# Altium PCB Main.PcbDoc
Units mil, origin at the board's own origin, x right, y up, seen from the top; angles counter-clockwise.
Board outline 670 x 1325 mil, 2 copper layers (Top Layer, Bottom Layer); 20 components, 20 nets, 83 pads, 10 vias.
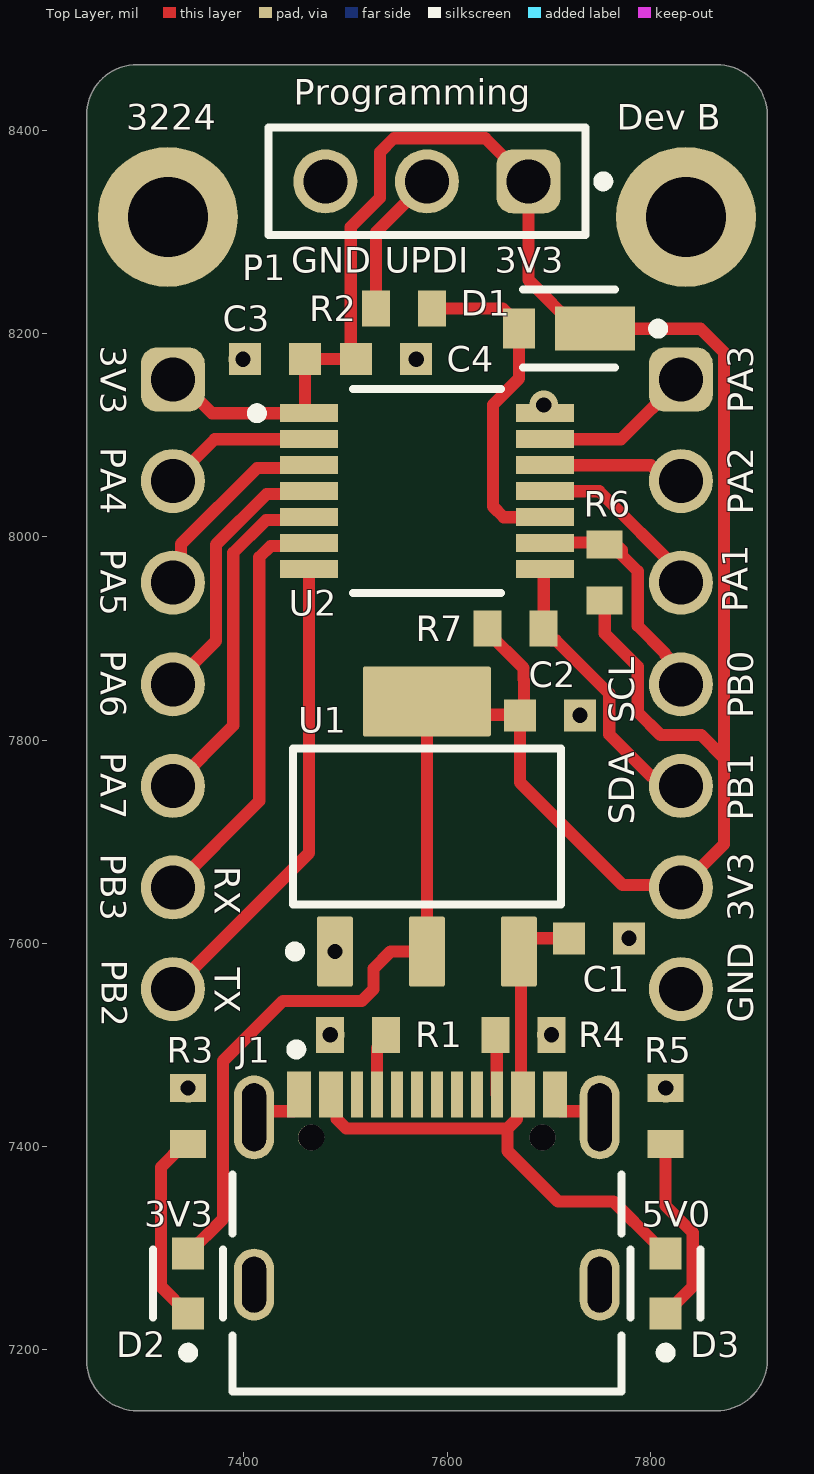
[diagram p0: Top Layer view]
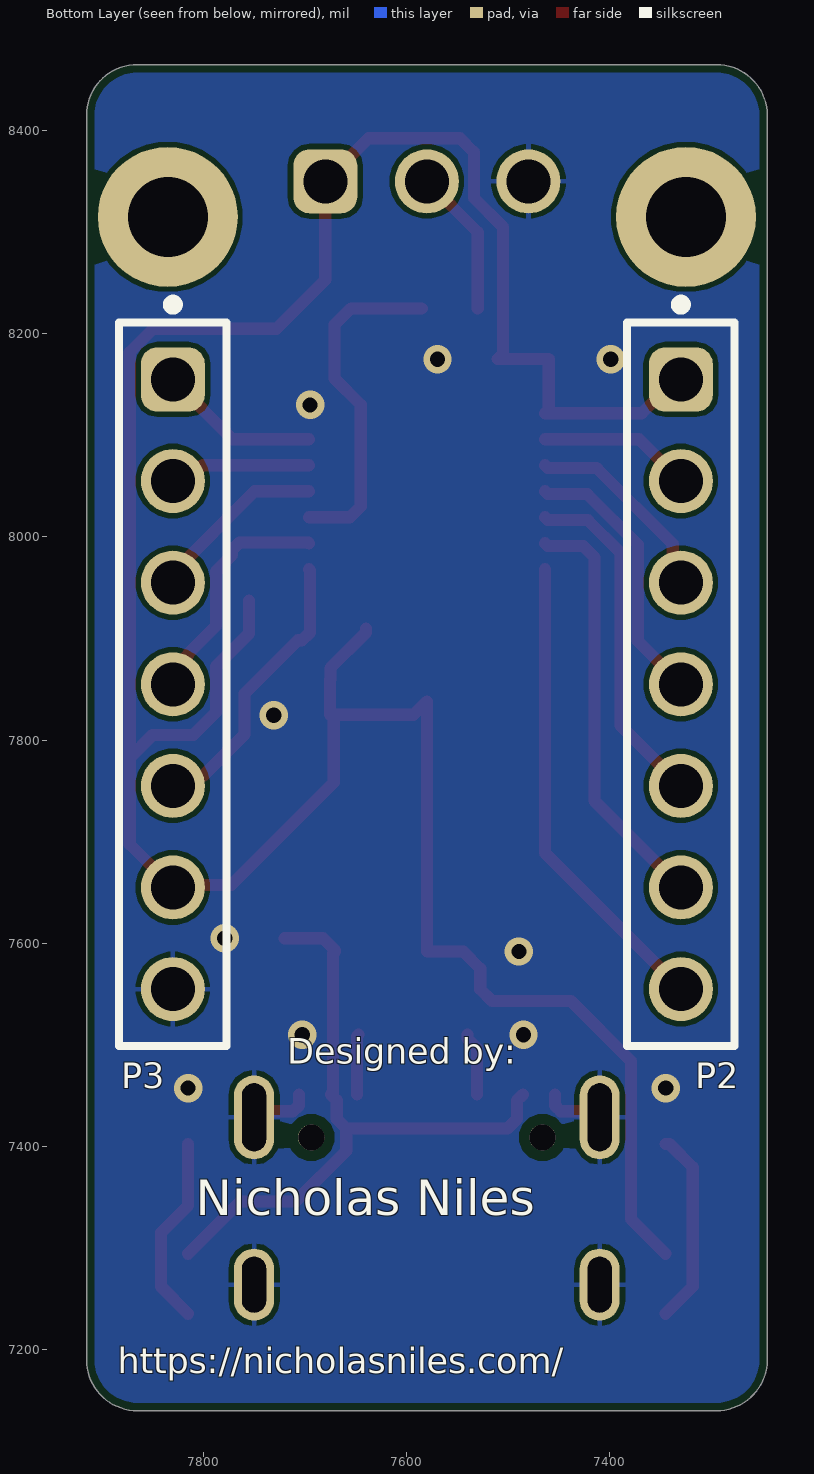
[diagram p1: Bottom Layer view, seen from below]
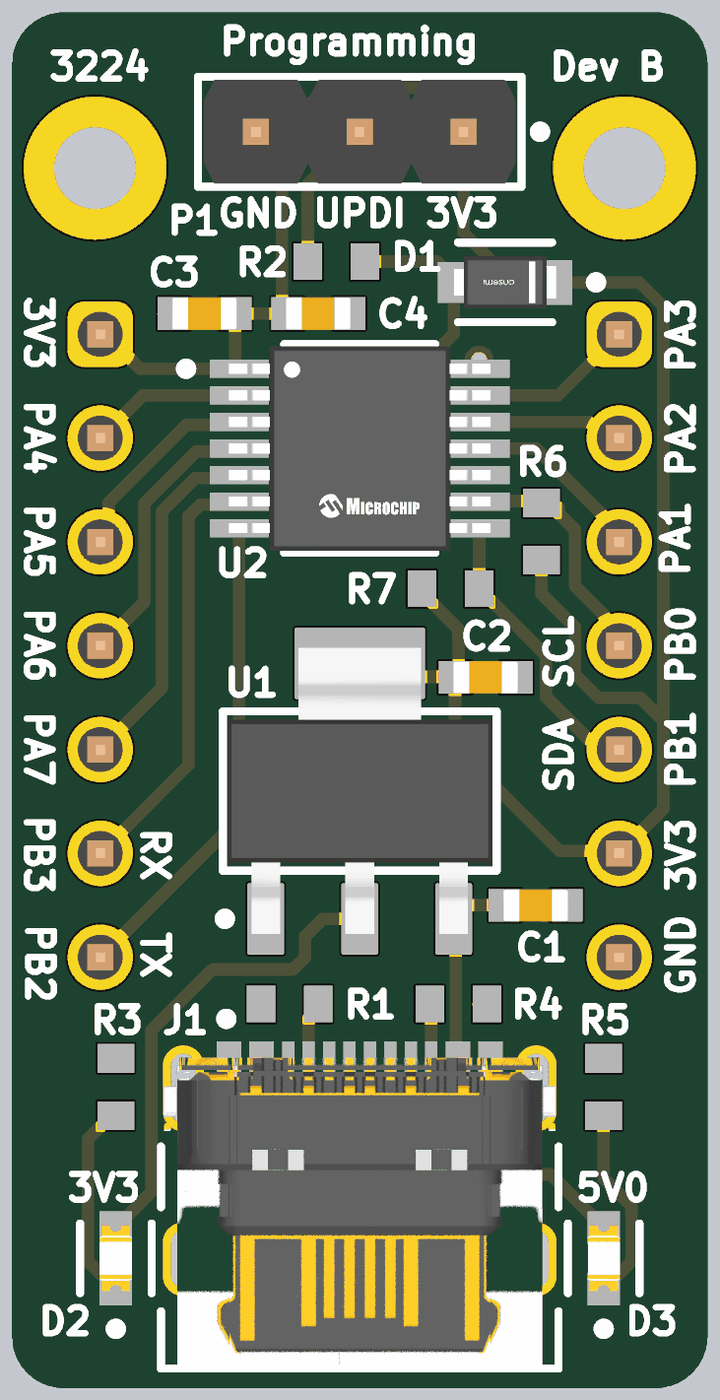
[diagram p2: 3D render of the assembled board from above, using the file's embedded part models]

## Layer stack, top to bottom
Top Solder: solder mask 0.4, Solder Resist, Dk 3.5
Top Layer: signal copper 1.4
Dielectric 1: dielectric 12.6, FR-4, Dk 4.8
Bottom Layer: signal copper 1.4
Bottom Solder: solder mask 0.4, Solder Resist, Dk 3.5

## Board outline
7245,7190 7245,8415 cw(c7295,8415) 7295,8465 7865,8465 cw(c7865,8415) 7915,8415 7915,7190 cw(c7865,7190) 7865,7140 7295,7140 cw(c7295,7190)

## Design rules (kind name [scope] priority, off if disabled: settings)
BoardOutlineClearance [All] p1: gap=7.87 ignorepadtopadclearanceinfootprint=FALSE
Clearance [All] p1: gap=5 ignorepadtopadclearanceinfootprint=TRUE except(10: Arc-Hole Track-Hole SMDPad-Hole THPad-Hole Via-Hole Fill-Hole Poly-Hole Region-Hole Text-Hole)
ComponentClearance [All] p1: gap=5 collisioncheckmode=3 verticalgap=5 showdistances=TRUE
DiffPairsRouting [All] p1: maxlimit=10 minlimit=5 mostfreqgap=5 toplayer_minwidth=5 toplayer_maxwidth=1000 toplayer_prefwidth=5 bottomlayer_minwidth=5 bottomlayer_maxwidth=1000 bottomlayer_prefwidth=5 maxuncoupledlength=500
Height [All] p1: minheight=0 maxheight=71497.94 prefheight=500
HoleSize [All] p1: absolutevalues=TRUE maxlimit=248.03 minlimit=11.81 maxpercent=80.000 minpercent=20.000
HoleToHoleClearance [All] p1: gap=10 allowstackedmicrovias=FALSE
MinimumAnnularRing [All] p1: minimumring=6
MinimumSolderMaskSliver [All] p1: minsoldermaskwidth=6
PlaneClearance [All] p1: clearance=5
PlaneConnect PlaneConnectPowerPads [InPadClass('PowerPads')] p1: planeconnectstyle=Direct reliefexpansion=20 reliefentries=4 reliefconductorwidth=10 reliefairgap=10
PlaneConnect [All] p2: pad.planeconnectstyle=Relief pad.reliefexpansion=11.81 pad.reliefentries=4 pad.reliefconductorwidth=5 pad.reliefairgap=5 via.planeconnectstyle=Direct via.reliefexpansion=11.81 via.reliefentries=4 via.reliefconductorwidth=5 via.reliefairgap=5
PolygonConnect PolygonConnectPowerPads [All vs (InPadClass('PowerPads'))] p1: connectstyle=Direct reliefconductorwidth=10 reliefentries=4 polygonreliefangle="90 Angle" airgapwidth=10
PolygonConnect [All] p2: thpad.connectstyle=Relief thpad.reliefconductorwidth=5 thpad.reliefentries=4 thpad.polygonreliefangle="90 Angle" thpad.airgapwidth=5 smdpad.connectstyle=Relief smdpad.reliefconductorwidth=5 smdpad.reliefentries=4 smdpad.polygonreliefangle="90 Angle" smdpad.airgapwidth=5 via.connectstyle=Direct via.reliefconductorwidth=5 via.reliefentries=4 via.polygonreliefangle="90 Angle" via.airgapwidth=5
RoutingVias [All] p1: holewidth=11.81 width=23.62 viastyle="Through Hole" minholewidth=11.81 minwidth=23.62 maxholewidth=23.62 maxwidth=259.84
SilkToSilkClearance [All] p1: silktosilkclearance=5
SilkToSolderMaskClearance [IsPad] p1: minsilkscreentomaskgap=5 clearancetoexposedcopper=TRUE
SolderMaskExpansion [All] p1: expansion=2 istentingtop=FALSE
SupplyNets "Schematic Supply Nets_6" [InNet('5V0')] p1: voltage=0.000
SupplyNets "Schematic Supply Nets_4" [InNet('3V3')] p2: voltage=0.000
SupplyNets "Schematic Supply Nets_2" [InNet('GND')] p3: voltage=0.000
UnRoutedNet [All] p1: checkbadconnections=TRUE
Width Width_10mil [All] p1: maxlimit=1000 minlimit=12 preferedwidth=12 minimp=50.000000 maximp=50.000000 favimp=50.000000
Width Width_6mil [All] p2: maxlimit=1000 minlimit=6 preferedwidth=6 minimp=50.000000 maximp=50.000000 favimp=50.000000
Width Power_20mil [All] p3: maxlimit=1000 minlimit=20 preferedwidth=20 minimp=50.000000 maximp=50.000000 favimp=50.000000
Width Power_12mil [All] p4: maxlimit=1000 minlimit=12 preferedwidth=12 minimp=50.000000 maximp=50.000000 favimp=50.000000
Width Width_5mil [All] p5: maxlimit=1000 minlimit=5 preferedwidth=5 minimp=50.000000 maximp=50.000000 favimp=50.000000
19 further rules are at their usual default settings.

## Components (designator, comment, footprint, x,y, rotation, side; value= is the part's Value field where it differs from the comment)
C1 "1uF" WCAP-CSGP_0603_L1.6W0.8H0.8_Reflow 7749.53,7605 r180 top
C2 "1uF" WCAP-CSGP_0603_L1.6W0.8H0.8_Reflow 7701.28,7824.47 r180 top
C3 "10uF" WCAP-CSGP_0603_L1.6W0.8H0.8_Reflow 7430.47,8175 r0 top
C4 "1uF" WCAP-CSGP_0603_L1.6W0.8H0.8_Reflow 7540,8175 r180 top
D1 "NRVBSS14HE" FP-477AD-MFG 7720,8205 r180 top
D2 "LTST-C190KGKT" FP-LTST-C190KGKT-MFG 7345,7265 r90 top
D3 "LTST-C190KGKT" FP-LTST-C190KGKT-MFG 7815,7265 r90 top
J1 "USB4105-GF-A" FP-USB4105-GF-A-MFG 7580,7310 r0 top locked
P1 "61300311121" 61300311121 7580,8350 r180 top
P2 "61300711121" 61300711121 7330,7855 r270 bottom
P3 "61300711121" 61300711121 7830,7855 r270 bottom
R1 "5.1k" RESC1608X55X25NL10T15 7512.44,7510 r180 top
R2 "1k" RESC1608X55X25NL10T15 7557.44,8225 r0 top
R3 "1k" RESC1608X55X25NL10T15 7345,7430 r90 top
R4 "5.1k" RESC1608X55X25NL10T15 7675,7510 r0 top
R5 "2.2k" RESC1608X55X25NL10T15 7815,7430 r90 top
R6 "4.7k" RESC1608X55X25NL10T15 7755,7965 r270 top
R7 "4.7k" RESC1608X55X25NL10T15 7667.44,7910 r180 top
U1 "TLV1117LV33DCYR" DCY0004A_N 7580,7715 r90 top
U2 "ATTINY3224-XU" FP-C04-087-ST-MFG 7580,8045 r0 top

## Footprints (in the part's own frame and the unit in brackets; to place one, negate y for a bottom-side part, rotate by r counter-clockwise, add the part's x,y. Pads: shape width x height; smd on the part's side, far side on the other; paste and mask are expansions set on the pad)
61300311121 [mm] "Pin Header, pitch 2.54 mm, THT, Vertical, single row, 3p"
  rrect50% 1.6x1.6 hole 1.1: 1(-2.54,0)
  round 1.6 hole 1.1: 2(0,0) 3(2.54,0)
  silkscreen extent -4.53,-1.35 3.96,1.35, body extent -3.81,-1.27 3.81,1.27, height 8.57
61300711121 [mm] "Pin Header, pitch 2.54 mm, THT, Vertical, single row, 7p"
  rrect50% 1.6x1.6 hole 1.1: 1(-7.62,0)
  round 1.6 hole 1.1: 2(-5.08,0) 3(-2.54,0) 4(0,0) 5(2.54,0) 6(5.08,0) 7(7.62,0)
  silkscreen extent -9.61,-1.35 9.04,1.35, body extent -8.89,-1.27 8.89,1.27, height 8.57
DCY0004A_N [mm] "SOT223, 4-Leads, Body 6.7x3.7mm, Pitch 2.3mm, IPC Medium Density"
  rrect11% 1.75x0.9 smd: 1(-3.125,2.3) 2(-3.125,0) 3(-3.125,-2.3)
  rrect6% 1.75x3.2 smd: 4(3.125,0)
  silkscreen extent -3.25,-3.35 1.95,3.42, body extent -3.5,-3.25 3.5,3.25, height 1.62
FP-477AD-MFG [mm]
  rect 2x1.1 smd paste+0 mask+0: 1(-0.65,0)
  rect 0.8x1 smd paste+0 mask+0: 2(1.25,0)
  silkscreen extent -2.35,-0.97 1.15,0.97, body extent -1.75,-0.8 1.75,0.8, height 0.25
FP-C04-087-ST-MFG [mm]
  rect 1.45x0.45 smd paste+0 mask+0: 1(-2.95,1.95) 2(-2.95,1.3) 3(-2.95,0.65) 4(-2.95,0) 5(-2.95,-0.65) 6(-2.95,-1.3) 7(-2.95,-1.95) 8(2.95,-1.95) 9(2.95,-1.3) 10(2.95,-0.65) 11(2.95,0) 12(2.95,0.65) 13(2.95,1.3) 14(2.95,1.95)
  silkscreen extent -4.37,-2.55 1.85,2.55, body extent -3.77,-2.65 3.77,2.65, height 0.25
FP-LTST-C190KGKT-MFG [mm]
  rect 0.8x0.8 smd paste+0 mask+0: 1(-0.75,0) 2(0.75,0)
  silkscreen extent -1.85,-0.87 0.85,0.87, body extent -1.25,-0.55 1.25,0.55, height 0.25
FP-USB4105-GF-A-MFG [mm]
  rrect100% 1x2.1 hole 1.7 slot 0.6 at 0 deg paste-2539.97 mask+0: 1(-4.32,3.015) 2(4.32,3.015)
  rrect100% 1x1.8 hole 1.4 slot 0.6 at 0 deg paste-2539.97 mask+0: 3(-4.32,-1.165) 4(4.32,-1.165)
  rect 0.6x1.15 smd paste+0 mask+0: A1-B12(-3.2,3.59) A4-B9(-2.4,3.59) B1-A12(3.2,3.59) B4-A9(2.4,3.59)
  rect 0.3x1.15 smd paste+0 mask+0: A5(-1.25,3.59) A6(-0.25,3.59) A7(0.25,3.59) A8(1.25,3.59) B5(1.75,3.59) B6(0.75,3.59) B7(-0.75,3.59) B8(-1.75,3.59)
  round 0.65 hole 0.65 unplated paste-2539.97 mask+0: ""(-2.89,2.515) ""(2.89,2.515)
  silkscreen extent -4.86,-3.84 4.86,4.84, body extent -4.96,-3.94 4.96,4.27, height 0.25
RESC1608X55X25NL10T15 [mm] "Chip Resistor, 2-Leads, Body 1.60x0.80mm, IPC Medium Density"
  rect 0.7x0.9 smd: 1(-0.7,0) 2(0.7,0)
  body extent -0.85,-0.45 0.85,0.45, height 0.55
WCAP-CSGP_0603_L1.6W0.8H0.8_Reflow [mm] "Ceramic Capacitors, body 1.6x0.8mm"
  rect 0.8x0.8 smd: 1(-0.75,0) 2(0.75,0)
  body extent -0.8,-0.4 0.8,0.4, height 0.8

## Part data
C1 C2 C3 C4: library part CMP-207839-000060-3, "10V tolerance"
D1: library part CMP-00278-93203856-2, "NRVBSS14HE Rectifier Diode, Schottky, 1 Phase, 1 Element, 1A, 40V V(RRM), Silicon", Capacitance=55pF, Forward Current=1A, Manufacturer Lifecycle Status=ACTIVE, Max Forward Surge Current (Ifsm)=25A, Max Junction Temperature (Tj)=150°C, Max Repetitive Reverse Voltage (Vrrm)=40V, Min Operating Temperature=-55°C, Peak Reverse Current=5µA, Height=750µm, Lifecycle Status=Production, Max Operating Temperature=150°C, NexarPartId=93203856, Reverse Voltage=40V, RoHS=Compliant
D2 D3: library part CMP-2000-05197-2, "LED GREEN CLEAR CHIP SMD", Case Code (Imperial)=0603, Case Code (Metric)=1608, Color=Green, Forward Current=30mA, Forward Voltage=2V, Lens Color=Colorless, Max Operating Temperature=85°C, Min Operating Temperature=-55°C, Package Quantity=1, Power Dissipation=75mW, Reverse Voltage=5V, Test Current=20mA, Case/Package=0603, Depth=0.8mm, Dominant Wavelength=571nm, Height=0.8mm, Illumination Color=Green, Lead Free="Lead Free", Length=1.6mm, Lens Style=Diffused, Lens Transparency=Clear, Luminous Intensity=35mcd, Mount="Surface Mount", Number of Elements=1, Number of LEDs=1, Number of Pins=2, Packaging="Tape and Reel", Power Rating=75mW, Radiation Hardening=No, Viewing Angle=130°, Wavelength=574nm, Width=0.8mm
J1: library part CMP-245163-000001-1, "CONN RCPT USB2.0 TYPEC 5A", Current Rating=5/6.25/1.25/0.25A, Manufacturer=GCT, Package=0, Temperature="-40°C to +85°C", Temperature Range High=+85°C, Temperature Range Low=-40°C, Voltage Rating=20V, Automotive=No, Category=Conn, ComponentLink2Description=Datasheet, ComponentLink2URL=https://gct.co/files/drawings/usb4105.pdf, Conn Orientation="Right Angle", Contact Material=Gold,Nickel, Device Class L1=Connectors, Device Class L2="USB Connectors", Device Class L3=unset, Digikey Description="CONN RCPT USB2.0 TYPEC 5A", Height=3.46mm, Is Female=yes, Lead Free=Yes, Manufacturer Part Number=USB4105-GF-A, Number of Contacts=16, Octopart=https://octopart.com/usb4105-gf-a-gct-106627878, RoHS=TRUE, Usb Standard="USB 2.0"
P1: library part CMP-1502-01062-4, "THT Vertical Pin Header WR-PHD, Pitch 2.54 mm, Single Row, 3 pins", Color=Black, Contact Resistance=20mΩ, Current Rating=3A, Max Operating Temperature=105°C, Min Operating Temperature=-40°C, Operating Supply Voltage=250V, Connector Type="Male Pin", Contact Material=Gold, Contact Mating Length=5.9944mm, Contact Plating=Gold, Gender=Male, Height=8.94mm, Lead Free="Lead Free", Lead Pitch=2.54mm, Mount="Through Hole", Number of Contacts=3, Number of Pins=3, Number of Positions=3, Number of Rows=1, Orientation=Vertical, Packaging=Bulk, Pitch=2.54mm, RoHS=Compliant, Termination=Solder, Voltage Rating=250V
P2 P3: library part CMP-1502-01074-4, "THT Vertical Pin Header WR-PHD, Pitch 2.54 mm, Single Row, 7 pins", Color=Black, Contact Resistance=20mΩ, Current Rating=3A, Operating Supply Voltage=250V, Connector Type="Male Pin", Contact Material=Copper, Contact Mating Length=5.9944mm, Contact Plating=Gold, Gender=Male, Lead Pitch=2.54mm, Mount="Through Hole", Number of Contacts=7, Number of Pins=7, Number of Positions=7, Number of Rows=1, Orientation=Vertical, Packaging=Bulk, Pitch=2.54mm, RoHS=Compliant, Termination=Solder
R1 R2 R3 R4 R5 R6 R7: library part CMP-2000-04186-1
U1: library part CMP-0395-00503-2, "Single Output LDO, 1 A, Fixed 3.3 V Output, 2 to 5.5 V Input, 4-pin SOT-223 (DCY), -40 to 125 degC, Green (RoHS & no Sb/Br)", Manufacturer="Texas Instruments", Accuracy(%)=2, Code_JEDEC=TO-261, ComponentLink1Description="Manufacturer URL", ComponentLink1URL=http://www.ti.com/, ComponentLink2Description=Datasheet, ComponentLink2URL=http://www.ti.com/general/docs/lit/getliterature.tsp?genericPartNumber=TLV1117LV33&fileType=pdf, ComponentLink3Description="Package Specification", ComponentLink3URL=http://www.ti.com/litv/pdf/mpds094a, DatasheetVersion=SBVS160A, Eco-Plan="Green (RoHS & no Sb/Br)", Fixed Output Options(V)=3.3, Iout(Max)(A)=1, Iq(Typ)(mA)=0.05, Mounting Technology="Surface Mount", PackageDescription="4-Pin Plastic Small Outline, Body 3.5 x 6.5 mm, Pitch 2.3 mm", PackageReference=DCY0004A, PackageVersion=4202506/B, PartNumber=TLV1117LV33DCYR, SubFamily="Single Channel LDO", Vdo(Typ)(mV)=1200, Vin(Max)(V)=5.5, Vin(Min)(V)=2, Vout Adj(Max)(V)=3.3, Vout Adj(Min)(V)=3.3
U2: library part CMP-00252-122240563-1, "ATTINY3224-XU Microcontroller 8-Bit AVR RISC 32KB Flash 1.8V to 5.5V 14-Pin TSSOP Tube", NexarPartId=122240563

## Free pads (board coordinates)
  round 137.79 hole 78.74: 7(7325,8315) 7(7835,8315)

## Via types
v1: diameter 28, hole 15, Top Layer to Bottom Layer, tented both sides, 10 vias

## Nets (pads, with @x,y where several pads share a name; then routed paths per layer and width w, separated by ;. In a path a pad name is that pad's centre, name@x,y a point inside that pad or via, vN(x,y) a via of type N, cw(c..) or ccw(c..) an arc to the next point about the centre after c; other vN are vias at no path point)
3V3: C2.2 C3.2 C4.2 D1.1 D2.2 P1.1 P2.1 P3.6 R6.2 R7.2 U1.2 U1.4 U2.1 | length 2906.5
  Top Layer w12: P2.1 7335.28,8155 7368.5,8121.77 U2.1 7462.86,8121.77 7460,8124.63 C3.2 C4.2 7505.1,8180.37 7505.1,8305.1 7533.75,8333.75 7533.75,8378.75 7547.5,8392.5 7637.5,8392.5 P1.1 7680,8252.87 7727.87,8205 7849.32,8205 7872.5,8181.83 7872.5,7782.5 ; D2.2 7379.24,7328.76 7379.24,7484.24 7438.25,7543.25 7515.89,7543.25 7527.43,7554.79 7527.43,7575.12 7544.28,7591.97 U1.2 U1.4 7593.03,7825 7675.47,7825 7675.47,7859.53 7675,7860 7675,7870.94 7639.88,7906.06 R7.2 ; C2.2 7671.75,7758.25 7772.53,7657.47 7827.53,7657.47 P3.6 7872.5,7697.5 7872.5,7782.5 ; R6.2 7755,7905 7787.5,7872.5 7787.5,7827.5 7810,7805 7850,7805 7872.5,7782.5
5V0: C1.2 D3.2 J1.A4-B9 J1.B4-A9 U1.3 | length 656
  Top Layer w12: J1.A4-B9 7491.32,7445.53 7491.32,7427.02 7500.64,7417.7 7659.36,7417.7 ; C1.2 7682.27,7605 7670.55,7593.28 U1.3 7672.52,7590 7672.52,7453.31 J1.B4-A9 7668.68,7445.53 7668.68,7427.02 7659.36,7417.7 ; D3.2 7805.25,7304.28 7763.72,7345.81 7709.19,7345.81 7659.36,7395.64 7659.36,7417.7
GND: C1.1 C2.1 C3.1 C4.1 J1.1 J1.2 J1.3 J1.4 J1.A1-B12 J1.B1-A12 P1.3 P3.7 R1.2 R3.2 R4.2 R5.2 U1.1 U2.14 | length 128.3
  Top Layer w12: J1.1 7415.92,7434.7 7448.2,7434.7 7454.02,7440.51 J1.A1-B12 ; v1(7695,8130) 7695,8122.91 U2.14 ; J1.B1-A12 7705.98,7440.51 7711.8,7434.7 7744.08,7434.7 J1.2
  other v1: 7345,7457.56 7815,7457.56 7484.88,7510 7702.56,7510 7489.45,7591.97 7779.06,7605 7730.8,7824.47 7398.98,8175 7569.53,8175
NetD2_1: D2.1 R3.1 | length 191.4
  Top Layer w12: D2.1 7318.25,7262.22 7318.25,7379.63 7341.06,7402.44 R3.1
NetD3_1: D3.1 R5.1 | length 189.1
  Top Layer w12: D3.1 7841.75,7262.22 7841.75,7315.07 7815,7341.81 R5.1
NetJ1_A5: J1.A5 R1.1 | length 62.5
  Top Layer w12: J1.A5 7530.79,7496.85 7540,7506.06 R1.1
NetJ1_B5: J1.B5 R4.1 | length 59.3
  Top Layer w12: R4.1 7648.8,7508.64 7648.8,7451.43 J1.B5
NetP1_2: P1.2 R2.1 | length 145.8
  Top Layer w12: R2.1 7529.88,8299.88 P1.2
PA1: P3.3 U2.11 | length 176.8
  Top Layer w12: U2.11 7749.61,8045 7830,7964.61 P3.3
PA2: P3.2 U2.12 | length 140.3
  Top Layer w12: U2.12 7800.61,8070.59 7816.2,8055 P3.2
PA3: P3.1 U2.13 | length 158.2
  Top Layer w12: U2.13 7771.18,8096.18 P3.1
PA4: P2.2 U2.2 | length 150.9
  Top Layer w12: P2.2 7371.18,8096.18 U2.2
PA5: P2.3 U2.3 | length 199.3
  Top Layer w12: P2.3 7338,7963 7338,7993 7412.73,8067.73 7461,8067.73 U2.3
PA6: P2.4 U2.4 | length 268.2
  Top Layer w12: P2.4 7372.5,7897.5 7372.5,7992.5 7422.14,8042.14 7461,8042.14 U2.4
PA7: P2.5 U2.5 | length 343
  Top Layer w12: P2.5 7389.5,7814.5 7389.5,7984.5 7421.55,8016.55 7461,8016.55 U2.5
PB0//SCL: P3.4 R6.1 U2.9 | length 235.2
  Top Layer w12: U2.9 7696.73,7994.41 7764.53,7994.41 7771.72,7987.22 7771.72,7982.1 7787.5,7966.31 7787.5,7912.5 7814.5,7885.5 7814.5,7884.3 7830,7868.8 P3.4
PB1//SDA: P3.5 R7.1 U2.8 | length 287.7
  Top Layer w12: R7.1 R7.1@7695,7906.06 ; U2.8 7695,7967.09 R7.1@7695,7906.06 ; P3.5 7820.24,7764.76 7800.24,7764.76 7759.51,7805.49 7759.51,7845.68 7706.91,7898.28 7702.78,7898.28 R7.1@7695,7906.06
PB2//TX: P2.7 U2.7 | length 468.7
  Top Layer w12: P2.7 7463.86,7688.86 U2.7
PB3//RX: P2.6 U2.6 | length 414.8
  Top Layer w12: P2.6 7415,7740 7415,7980 7425.96,7990.96 7461,7990.96 U2.6
UPDI: D1.2 R2.2 U2.10 | length 337.6
  Top Layer w12: R2.2 7654.72,8225 7670.79,8208.94 D1.2 7670.79,8155.93 7645,8130.14 7645,8030 7655.59,8019.41 U2.10
pads on no net: J1. J1.A6 J1.A7 J1.A8 J1.B6 J1.B7 J1.B8

## Polygon pours and split planes (outlines as drawn)
GND on Bottom Layer "GND_L02_P000" (solid, pour order 0): 7245,8465 7915,8465 7915,7140 7245,7140

## Silkscreen, mask and mechanical layers (free items; w line width, h text height)
Top Overlay:
  text "Programming" at 7448.79,8425.16 h25
  text "3224" at 7284.18,8401 h25
  text "Dev B" at 7766.69,8401 h25
  text "GND" at 7446.68,8259.83 h25
  text "UPDI" at 7538.35,8259.83 h25
  text "3V3" at 7646.68,8259.83 h25
  text "3V3" at 7259.01,8188.32 h25 r270
  text "PA3" at 7900.99,8121.68 h25 r90
  text "PA4" at 7259.01,8088.32 h25 r270
  text "PA2" at 7900.99,8021.68 h25 r90
  text "PA5" at 7259.01,7988.32 h25 r270
  text "PA1" at 7895.99,7925.84 h25 r90
  text "PA6" at 7259.01,7888.32 h25 r270
  text "PB0" at 7900.99,7821.68 h25 r90
  text "SCL" at 7784,7816.68 h25 r90
  text "PA7" at 7259.01,7788.32 h25 r270
  text "PB1" at 7900.99,7720.84 h25 r90
  text "SDA" at 7784,7716.68 h25 r90
  text "PB3" at 7259.01,7688.32 h25 r270
  text "RX" at 7371,7675.83 h25 r270
  text "3V3" at 7900.99,7621.68 h25 r90
  text "PB2" at 7260.15,7583.65 h25 r270
  text "TX" at 7371,7575.83 h25 r270
  text "GND" at 7900.99,7521.68 h25 r90
  text "3V3" at 7301.68,7321 h25
  text "5V0" at 7791.68,7321 h25
Bottom Overlay:
  text "Designed by:" at 7717.46,7481.67 h25
  text "Nicholas Niles" at 7807.43,7332.51 h35
  text "https://nicholasniles.com/" at 7884.07,7176.67 h25
Mechanical 1:
  the board outline again, w10